# Altium PCB BLUENRG-345_REV1_PT1_UN.PcbDoc (part 1 of 2)
Units mil, origin at the board's own origin, x right, y up, seen from the top; angles counter-clockwise.
Board outline 1244.08 x 1679.7 mil, 2 copper layers (Top Layer, Bottom Layer), stack 12.598 mil thick; 82 components, 55 nets, 261 pads, 212 vias.
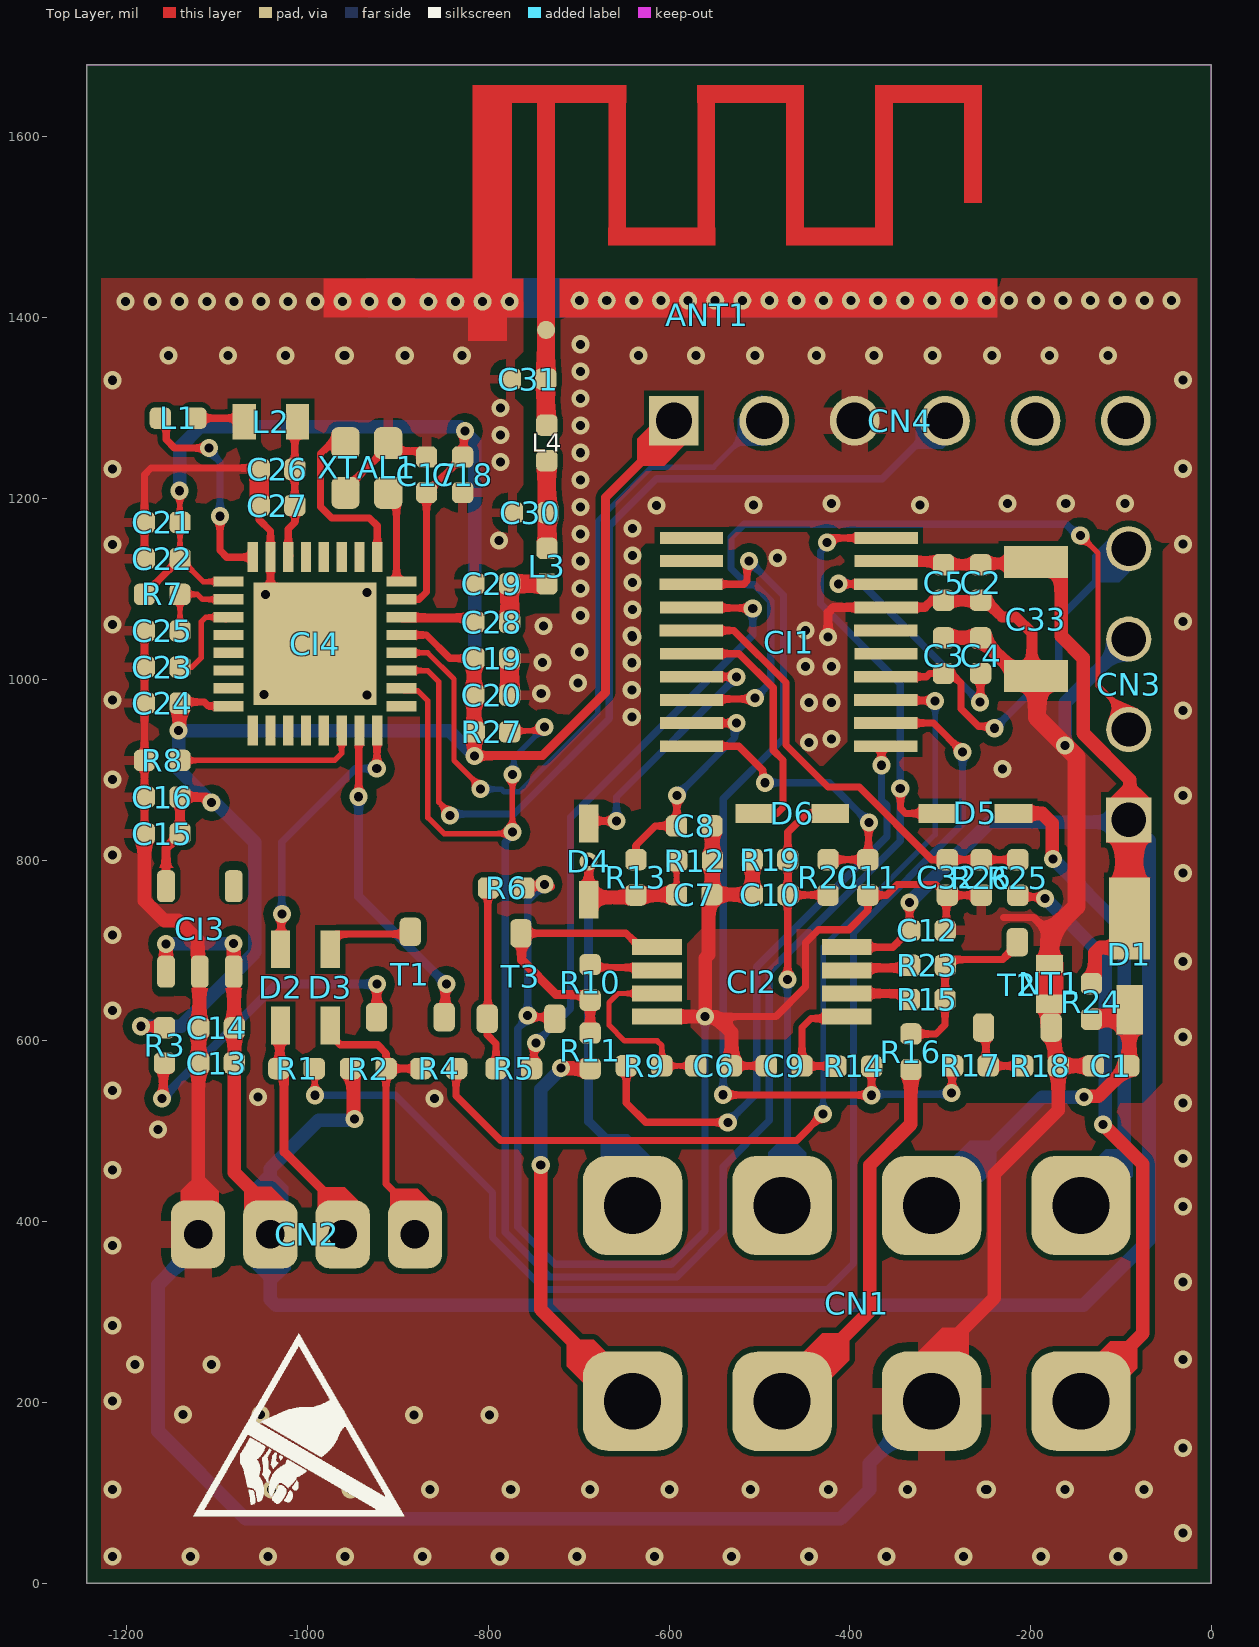
[diagram p0: Top Layer view]
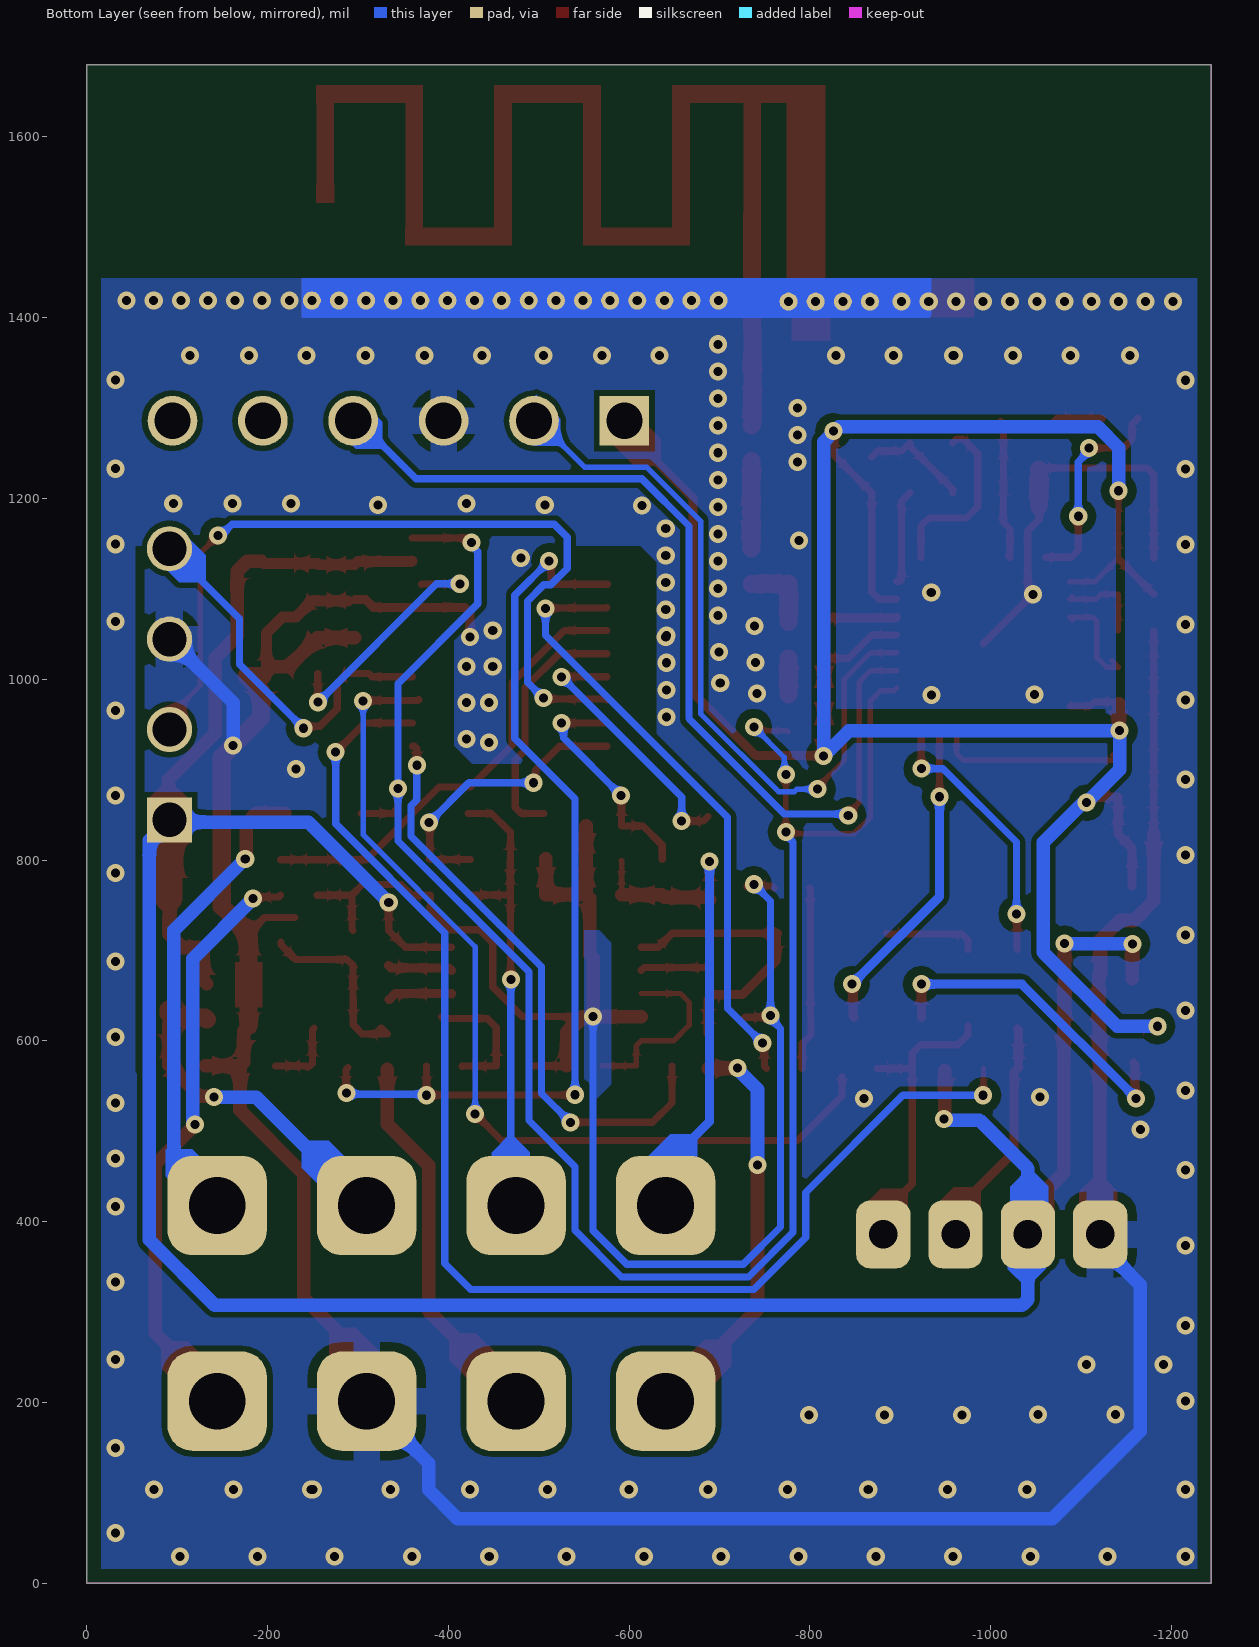
[diagram p1: Bottom Layer view, seen from below]
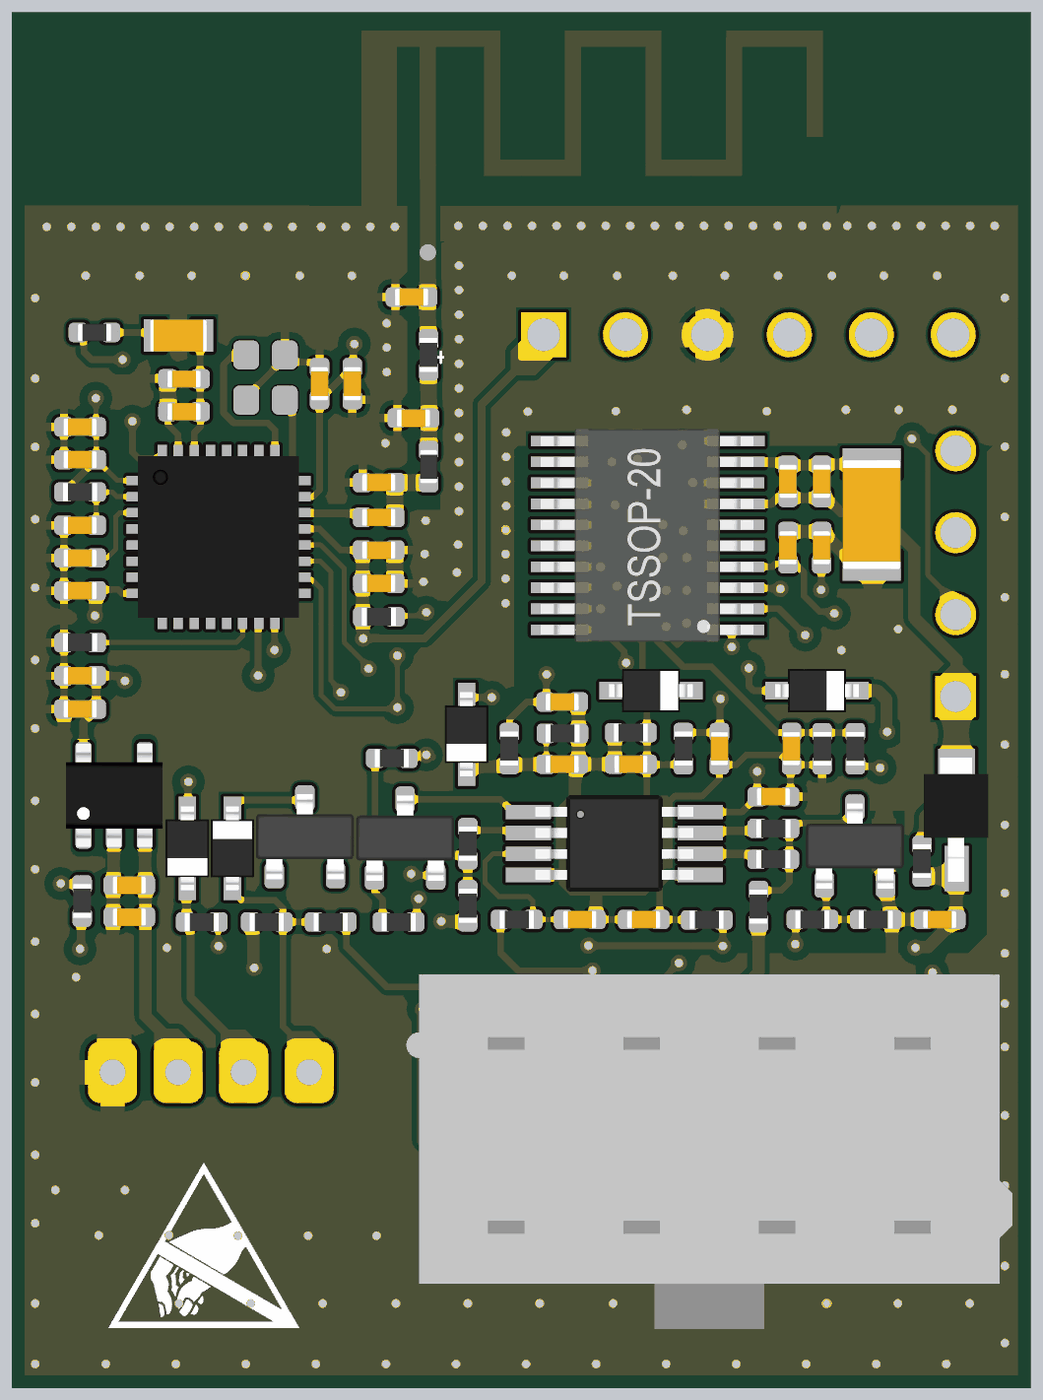
[diagram p2: 3D render of the assembled board from above, using the file's embedded part models]

## Layer stack, top to bottom
Top Solder: solder mask 0.3937, SM-001, Dk 3.5
Top Layer: signal copper 1.378
Dielectric 3: core 9.8425, Core-039, Dk 4.2
Bottom Layer: signal copper 1.378
Bottom Solder: solder mask 0.3937, SM-001, Dk 3.5

## Board outline
-1244.08,0.01 -1244.08,1679.71 0,1679.71 0,0.01

## Design rules (kind name [scope] priority, off if disabled: settings)
AssemblyTestPointUsage [All] p1 off:
AssemblyTestpoint [All] p1 off: testpointundercomponent=TRUE minsize=40 maxsize=100 preferedsize=60 minholesize=0 maxholesize=40 preferedholesize=32 testpointgrid=1 usegrid=TRUE gridtolerance=0.01 allowsidetop=TRUE allowsidebottom=TRUE
Clearance Clearance_Keepout [OnLayer('Keep-Out Layer, Board')] p1: gap=15 ignorepadtopadclearanceinfootprint=FALSE
Clearance Clearance_antena_2 [InNet('NetC32_1')] p2: gap=5 ignorepadtopadclearanceinfootprint=FALSE
Clearance Clearance_antena [InNet('NetC33_1')] p3: gap=5 ignorepadtopadclearanceinfootprint=FALSE
Clearance [All] p4: gap=6 ignorepadtopadclearanceinfootprint=FALSE except(10: Via-Via Via-Fill Via-Poly Via-Region Via-Text Via-Hole)
ComponentClearance [All] p1 off: gap=10 collisioncheckmode=3 verticalgap=10 showdistances=FALSE
DiffPairsRouting [All] p1 off: maxlimit=10 minlimit=10 mostfreqgap=10 toplayer_minwidth=15 toplayer_maxwidth=15 toplayer_prefwidth=15 bottomlayer_minwidth=15 bottomlayer_maxwidth=15 bottomlayer_prefwidth=15 maxuncoupledlength=500
FabricationTestPointUsage [All] p1 off: valid=0 allowmultiple=FALSE
FabricationTestpoint [All] p1 off: side=3 testpointundercomponent=TRUE minsize=40 maxsize=100 preferedsize=60 minholesize=0 maxholesize=40 preferedholesize=32 testpointgrid=1 allowsidetop=TRUE allowsidebottom=TRUE usegrid=TRUE gridtolerance=0.01
FanoutControl Fanout_BGA [IsBGA] p1 off: bgadir=Out bgaviamode=Centered fanoutstyle=Auto fanoutdirection=Alternating viagrid=1 // Fanout_BGA (Default Rule)
FanoutControl Fanout_LCC [IsLCC] p2 off: bgadir=Out bgaviamode=Centered fanoutstyle=Auto fanoutdirection=Alternating viagrid=1 // Fanout_LCC (Default Rule)
FanoutControl Fanout_SOIC [IsSOIC] p3 off: bgadir=Out bgaviamode=Centered fanoutstyle=Auto fanoutdirection=Alternating viagrid=1 // Fanout_SOIC (Default Rule)
FanoutControl Fanout_Small [(CompPinCount < 5)] p4 off: bgadir=Out bgaviamode=Centered fanoutstyle=Auto fanoutdirection=OutThenIn viagrid=1 // Fanout_Small (Default Rule)
FanoutControl Fanout_Default [All] p5 off: bgadir=Out bgaviamode=Centered fanoutstyle=Auto fanoutdirection=Alternating viagrid=1 // Fanout_Default (Default Rule)
Height [All] p1 off: minheight=0 maxheight=1000 prefheight=500
HoleSize [All] p1 off: absolutevalues=TRUE maxlimit=100 minlimit=1 maxpercent=80.000 minpercent=20.000
HoleToHoleClearance [All] p1 off: gap=10 allowstackedmicrovias=TRUE
LayerPairs [All] p1 off: enforce=TRUE
MinimumSolderMaskSliver [All] p1 off: minsoldermaskwidth=8
PasteMaskExpansion [All] p1 off: expansion=0
PlaneConnect [All] p1: planeconnectstyle=Relief reliefexpansion=20 reliefentries=4 reliefconductorwidth=50 reliefairgap=10
PolygonConnect [All] p1: thpad.connectstyle=Relief thpad.reliefconductorwidth=30 thpad.reliefentries=4 thpad.polygonreliefangle="90 Angle" thpad.airgapwidth=10 smdpad.connectstyle=Relief smdpad.reliefconductorwidth=10 smdpad.reliefentries=4 smdpad.polygonreliefangle="90 Angle" smdpad.airgapwidth=10 via.connectstyle=Direct via.reliefconductorwidth=10 via.reliefentries=4 via.polygonreliefangle="90 Angle" via.airgapwidth=10
RoutingCorners [All] p1 off: cornerstyle=45-Degree minsetback=100 maxsetback=100
RoutingLayers [All] p1 off: top layer_v5=TRUE bottom layer_v5=TRUE
RoutingPriority [All] p1 off: routingpriority=0
RoutingTopology [All] p1 off: topology=Shortest
RoutingVias [All] p1: holewidth=10 width=20 viastyle="Through Hole" minholewidth=8 minwidth=16 maxholewidth=10 maxwidth=20
SilkToBoardRegionClearance [All] p1 off:
SilkToSilkClearance [All] p1 off: silktosilkclearance=8
SilkToSolderMaskClearance [IsPad] p1 off: minsilkscreentomaskgap=8 clearancetoexposedcopper=TRUE
SolderMaskExpansion [All] p1 off: expansion=4 istentingtop=FALSE
UnRoutedNet UnRoutedNet_GNDD [InNet('GNDD')] p1: checkbadconnections=TRUE
UnRoutedNet [All] p2 off: checkbadconnections=TRUE
UnpouredPolygon [All] p1 off:
Width [All] p1: maxlimit=30 minlimit=3.94 preferedwidth=5.98 minimp=50.000000 maximp=50.000000 favimp=50.000000
3 further rules are at their usual default settings.

## Classes and differential pairs
component class FAST5.0_BLUENRG-345_REV1_Sheet3: ANT1 C13 C14 C15 C16 C17 C18 C19 C20 C21 C22 C23 C24 C25 C26 C27 C28 C29 C30 C31 CI3 CI4 L1 L2 L3 L4 R7 R8 XTAL1
component class FAST5.0_BLUENRG-345_REV1_Sheet2: C6 C7 C8 C9 C10 C11 C12 CI2 D4 D6 R5 R6 R9 R10 R11 R12 R13 R14 R15 R16 R17 R18 R19 R20 R23 T2 T3
component class FAST5.0_BLUENRG-345_REV1_Sheet1: C1 C2 C3 C4 C5 C32 C33 CI1 CN1 CN2 CN3 CN4 D1 D2 D3 D5 NT1 R1 R2 R3 R4 R24 R25 R26 R27 T1

## Components (designator, comment, footprint, x,y, rotation, side; value= is the part's Value field where it differs from the comment)
ANT1 "Antenna_Bluetury" Antenna_PCB_Bluetury -736,1386.44 r0 top net-tie
C1 "C0402" C0402_REV1 -111.08,572.27 r180 top value=100nF
C2 "C0402" C0402_REV1 -255.2,1107.01 r270 top value=220nF
C3 "C0402" C0402_REV1 -296.34,1026.09 r90 top value=100nF
C4 "C0402" C0402_REV1 -255.2,1026.09 r90 top value=1uF
C5 "C0402" C0402_REV1 -296.34,1107.01 r270 top value=100nF
C6 "C0402" C0402_REV1 -550.58,572.27 r180 top value=220nF
C7 "C0402" C0402_REV1 -572.08,761.77 r0 top value=2n2F
C8 "C0402" C0402_REV1 -572.08,837.77 r0 top value=1nF
C9 "C0402" C0402_REV1 -472.58,572.27 r0 top value=220nF
C10 "C0402" C0402_REV1 -488.08,761.77 r180 top value=2n2F
C11 "C0402" C0402_REV1 -380.08,780.77 r270 top value=1nF
C12 "C0402" C0402_REV1 -314.13,722.16 r180 top value=100nF
C13 "C0402" C0402_REV1 -1100.58,575.27 r0 top value=1nF
C14 "C0402" C0402_REV1 -1100.58,614.27 r0 top value=1uF
C15 "C0402" C0402_REV1 -1160.68,829.09 r0 top value=10uF
C16 "C0402" C0402_REV1 -1160.68,869.66 r0 top value=100nF
C17 "C0402" C0402_REV1 -868.28,1226.21 r270 top value=3pF
C18 "C0402" C0402_REV1 -828.28,1226.21 r90 top value=100nF
C19 "C0402" C0402_REV1 -796.08,1023.15 r180 top value=3pF
C20 "C0402" C0402_REV1 -796.08,982.47 r180 top value=100nF
C21 "C0402" C0402_REV1 -1160.68,1173.5 r0 top value=100nF
C22 "C0402" C0402_REV1 -1160.68,1133.5 r0 top value=4,7uF
C23 "C0402" C0402_REV1 -1160.68,1013.5 r0 top value=220nF
C24 "C0402" C0402_REV1 -1160.68,973.5 r0 top value=100nF
C25 "C0402" C0402_REV1 -1160.68,1053.5 r0 top value=10nF
C26 "C0402" C0402_REV1 -1033.72,1232.15 r0 top value=4,7uF
C27 "C0402" C0402_REV1 -1033.72,1192.15 r0 top value=100nF
C28 "C0402" C0402_REV1 -796.08,1063.15 r0 top value=3,4pF
C29 "C0402" C0402_REV1 -796.08,1105.63 r0 top value=1,2pF
C30 "C0402" C0402_REV1 -753.66,1184.33 r0 top value=0,5pF
C31 "C0603" C0402_REV1 -756,1332 r180 top
C32 "C0402" C0402_REV1 -292.08,780.77 r90 top value=10nF
C33 "C1206" C1206_rev1 -194.11,1066.49 r90 top value=100uF
CI1 "CI_STM8S003F3_TSSOP20" TSSOP20 -467.72,1041.09 r90 top value=STM8S003F3
CI2 "CI_LMV358_TSSOP8" "TSSOP-8_REV1 - MINISO8" -508.42,665.14 r270 top value=LMV358
CI3 "BU30TD3WG" SOT23-5L -1119.08,723.77 r0 top locked
CI4 "BLUENRG-345AC" QFN33 -991.71,1039.16 r0 top
CN1 "CON_MINIFIT_2X4_180" CONECTOR_MINIFIT_2X4_180 -640.33,200.53 r180 top locked
CN2 "CON_JS_1X4_180" "CONECTOR_ 1x4 2.0mm - 180°" -1121.08,385.77 r0 top locked
CN3 "CON_BP1X4_180" CONECTOR_BP1X4_SWIM_180 -91.48,994.37 r90 top locked
CN4 "CON_BP1X6_180" CONECTOR_BP1X6_180 -594.68,1285.97 r0 top locked value=SWD
D1 "D_STPS1L40M_DO216AA" DO216AA_REV1 -90.68,695.37 r270 top value=STPS1L40M
D2 "D_BAS16_SOD323" SOD323_IPC -1029.72,659.03 r90 top value=BAS16
D3 "D_BAS16_SOD323" SOD323_IPC -974.72,659.03 r270 top value=BAS16
D4 "D_BAS16_SOD323" SOD323_IPC -688.88,798.33 r90 top value=BAS16
D5 "D_BAS16_SOD323" SOD323_IPC -261.05,851.6 r180 top value=BAS16
D6 "D_BAS16_SOD323" SOD323_IPC -463.7,851.6 r180 top value=BAS16
L1 "IND 0402 22nH" L0402_REV1 -1143.13,1288.77 r0 top value=22nH
L2 "IND 0603 10uH" C0603_REV1 -1040.52,1285 r0 top value=10uH
L3 "IND 0402 3n9H" L0402_REV1 -735.08,1125.1 r90 top value=3n9H
L4 "RES 0402 0R 1/16W 5%" R0402_REV1 -735.15,1261.32 r270 top value=0R
NT1 "NET TIE 30mils" "NET TIE 30mils" -179.03,663.01 r90 top net-tie value={Value}
R1 "RES 0402 4K7 1/16W 5%" R0402_REV1 -1012.08,569.27 r0 top value=4K7
R2 "R0603" R0402_REV1 -932.72,569.27 r180 top value=47K
R3 "R0603" R0402_REV1 -1158.15,594.88 r90 top value=100R
R4 "RES 0402 4K7 1/16W 5%" R0402_REV1 -854.72,569.27 r0 top value=4K7
R5 "RES 0402 4K7 1/16W 5%" R0402_REV1 -771.7,569.27 r180 top value=4K7
R6 "R0603" R0402_REV1 -780.08,769.08 r180 top value=33K
R7 "R0402" R0402_REV1 -1160.68,1094 r0 top value=10K
R8 "R0402" R0402_REV1 -1160.68,910.23 r180 top value=100K
R9 "R0603" R0402_REV1 -627.58,572.27 r0 top value=33K
R10 "R0402" R0402_REV1 -687.25,664.69 r270 top value=100K
R11 "RES 0402 4R7 1/16W 5%" R0402_REV1 -687.25,588.96 r270 top value=4R7
R12 "R0402" R0402_REV1 -571.67,799.35 r180 top value=100K
R13 "R0603" R0402_REV1 -636.58,780.77 r90 top value=33K
R14 "R0603" R0402_REV1 -395.58,571.77 r180 top value=33K
R15 "R0402" R0402_REV1 -314.37,645.67 r0 top value=100K
R16 "RES 0402 4R7 1/16W 5%" R0402_REV1 -332.38,587.97 r270 top value=4R7
R17 "RES 0402 4K7 1/16W 5%" R0402_REV1 -266.58,572.27 r0 top value=4K7
R18 "R0603" R0402_REV1 -189.08,572.27 r180 top value=33K
R19 "R0402" R0402_REV1 -488.28,800.37 r0 top value=100K
R20 "R0603" R0402_REV1 -424.08,780.77 r90 top value=33K
R23 "RES 0402 0R 1/16W 5%" R0402_REV1 -314.08,683.47 r0 top value=0R
R24 "RES 0402 0R 1/16W 5%" R0402_REV1 -132.68,643.49 r270 top value=0R
R25 "R0402" R0402_REV1 -214.13,780.65 r270 top value=100K
R26 "R0402" R0402_REV1 -254.58,780.65 r270 top value=100K
R27 "R0402" R0402_REV1 -795.96,941.7 r0 top value=100K
T1 "NX7002AK" SOT23_REV1 -886.23,673.27 r90 top
T2 "BC817" SOT23_REV1 -214.68,661.9 r90 top locked
T3 "BC817" SOT23_REV1 -763.83,671.66 r90 top
XTAL1 "XTAL_CX2016DB" CX2016DB -934.33,1233.76 r270 top value=32MHz

## Footprints (in the part's own frame and the unit in brackets; to place one, negate y for a bottom-side part, rotate by r counter-clockwise, add the part's x,y. Pads: shape width x height; smd on the part's side, far side on the other; paste and mask are expansions set on the pad)
Antenna_PCB_Bluetury [mil]
  round 20 smd mask+4: 1(0,0)
  round 20 hole 10 mask+4: 2(-130.31,31.33) 2(-100.31,31.33) 2(-70.31,31.33) 2(-40.31,31.33) 2(37.09,32.51) 2(67.09,32.51) 2(97.09,32.51) 2(127.09,32.51) 2(157.09,32.51) 2(187.09,32.51) 2(217.09,32.51) 2(247.09,32.51) 2(277.09,32.51) 2(307.09,32.51) 2(337.09,32.51) 2(367.09,32.51) 2(397.09,32.51) 2(427.1,32.51) 2(457.1,32.51) 2(487.1,32.51)
  Top Layer region: -81.18,270.79 -81.18,46.29 -37.87,46.29 -37.87,270.79
  Top Layer region: 68.85,251.16 68.85,270.76 88.45,270.76 88.45,251.16
  Top Layer region: 68.85,93.68 68.85,113.28 88.45,113.28 88.45,93.68
  Top Layer region: 167.27,93.68 167.27,113.28 186.87,113.28 186.87,93.68
  Top Layer region: 167.27,251.16 167.27,270.76 186.87,270.76 186.87,251.16
  Top Layer region: 265.7,251.16 265.7,270.77 285.3,270.76 285.3,251.16
  Top Layer region: 265.7,93.68 265.7,113.28 285.3,113.28 285.3,93.68
  Top Layer region: 364.12,93.68 364.12,113.28 383.72,113.28 383.72,93.68
  Top Layer region: 364.12,251.16 364.12,270.76 383.72,270.76 383.72,251.16
  Top Layer region: 462.55,251.16 462.55,270.76 482.15,270.76 482.15,251.16
  Top Layer region: 462.55,140.93 462.55,160.53 482.15,160.53 482.15,140.93
  Top Layer lines w19.68: -67.95,261.12 -0.57,260.94 ; -27.57,261.09 -27.18,261.09 ; 0,0 -0.18,260.91 78.62,260.91 78.62,103.43 177.05,103.43 177.05,260.91 275.48,260.91 275.48,103.43 373.9,103.43 373.9,260.91 472.33,260.91 472.33,150.68
C0402_REV1 [mm]
  rrect50% 0.6x0.6 smd: 1(-0.5,0) 2(0.5,0)
  body extent -0.53,-0.28 0.53,0.28, height 0.6
C0603_REV1 [mm] "Capacitor SMD"
  rect 0.65x1 smd: 1(-0.75,0) 2(0.751,0)
  body extent -0.88,-0.5 0.89,0.51, height 0.91
C1206_rev1 [mm] "Capacitor SMD 1206"
  rect 0.9x1.8 smd: 1(-1.6,0) 2(1.6,0)
  body extent -1.7,-0.9 1.7,0.9, height 1.8
"CONECTOR_ 1x4 2.0mm - 180°" [mil] "Conector 1x4 180º 2.00mm"
  rrect50% 60x75 hole 31.5: 1(0,0) 2(80,0) 3(160,0) 4(240,0)
  body extent -80,-70 320,117, height 236
CONECTOR_BP1X4_SWIM_180 [mil] "Conector barra de pinos 1x4 180º SWIN"
  rect 50x50 hole 38: 1(-150,0)
  round 50 hole 38: 2(-50,0) 3(50,0) 4(150,0)
CONECTOR_BP1X6_180 [mil] "Conector barra de pinos 1x6 180º"
  rect 55x55 hole 40: 1(0,0)
  round 55 hole 40: 2(100,0) 3(200,0) 4(300,0) 5(400,0) 6(500,0)
CONECTOR_MINIFIT_2X4_180 [mil] "Conector MINIFIT 2x4 180º"
  rrect50% 110x110 hole 63: 1(-0.03,-0.72) 2(-0.03,-217.24) 3(-165.39,-0.71) 4(-165.39,-217.24) 5(-330.75,-0.72) 6(-330.75,-217.24) 7(-496.1,-0.72) 8(-496.1,-217.24)
  body extent -618,-305 122,128, height 120
CX2016DB [mm] "Cristal"
  rrect50% 0.9x0.8 smd mask+0.05: 1(-0.7,-0.6) 2(0.7,-0.6) 3(0.7,0.6) 4(-0.7,0.6)
  body extent -1,-0.79 1,0.81, height 0.4
DO216AA_REV1 [mm] "Diodo DO216AA REV1"
  rect 0.254x0.508 smd paste+0 mask+0: 1(-1.54,-0.008)
  rect 2.3x1.15 smd: 1(-1.016,0.008)
  rect 1.4x0.75 smd: 2(1.55,0.008)
  body extent -1.89,-1.01 1.96,0.99, height 1.01
L0402_REV1 [mm]
  rrect50% 0.6x0.6 smd: 1(-0.5,0) 2(0.5,0)
  body extent -0.53,-0.28 0.53,0.28, height 0.6
"NET TIE 30mils" [mil] "Net Tie 30mils"
  rect 20x30 smd paste-11.81 mask+0: 1(22,0) 2(-22,0)
  Top Layer region: 24,-15 -26,-15 -26,15 24,15
QFN33 [mm] "QFN 32 + GND"
  rect 0.29x0.84 smd: 1(-1.75,-2.435) 2(-1.25,-2.435) 3(-0.75,-2.435) 4(-0.25,-2.435) 5(0.25,-2.435) 6(0.75,-2.435) 7(1.25,-2.435) 8(1.75,-2.435) 17(1.75,2.435) 18(1.25,2.435) 19(0.75,2.435) 20(0.25,2.435) 21(-0.25,2.435) 22(-0.75,2.435) 23(-1.25,2.435) 24(-1.75,2.435)
  rect 0.84x0.29 smd: 9(2.435,-1.75) 10(2.435,-1.25) 11(2.435,-0.75) 12(2.435,-0.25) 13(2.435,0.25) 14(2.435,0.75) 15(2.435,1.25) 16(2.435,1.75) 25(-2.435,1.75) 26(-2.435,1.25) 27(-2.435,0.75) 28(-2.435,0.25) 29(-2.435,-0.25) 30(-2.435,-0.75) 31(-2.435,-1.25) 32(-2.435,-1.75)
  rect 3.45x3.45 smd: 33(0,0)
  body extent -2.5,-2.5 2.5,2.5, height 1.05
R0402_REV1 [mm]
  rrect50% 0.6x0.6 smd: 1(-0.5,0) 2(0.5,0)
  body extent -0.53,-0.28 0.53,0.28, height 0.6
SOD323_IPC [mm] "Encapsulamento SOD323"
  rect 1.06x0.54 smd: 1(1.07,0) 2(-1.07,0)
  body extent -1.3,-0.67 1.3,0.68, height 1.1
SOT23-5L [mm] "Encapsulamento SOT23 5v"
  rrect50% 0.5x0.9 smd: 1(-0.95,-1.2) 2(0,-1.2) 3(0.95,-1.2) 4(0.95,1.2) 5(-0.95,1.2)
  body extent -1.5,-1.6 1.5,1.6, height 0.92
SOT23_REV1 [mm] "Encapsulamento SOT23 REV1"
  rrect50% 0.8x0.6 smd: 1(-1.2,0.95) 2(-1.2,-0.95) 3(1.2,0)
  body extent -1.32,-1.52 1.32,1.52, height 1.11
TSSOP20 [mil] "Encapsulamento TSSOP20"
  rect 13x70 smd: 1(-115.16,-107.45) 2(-89.56,-107.42) 3(-63.98,-107.45) 4(-38.39,-107.49) 5(-12.8,-107.73) 6(12.8,-107.52) 7(38.39,-107.87) 8(64.1,-107.48) 9(89.69,-107.87) 10(115.16,-107.87) 11(115.16,107.48) 12(89.68,107.48) 13(64.09,107.87) 14(38.39,107.48) 15(12.8,107.56) 16(-12.8,107.53) 17(-38.39,107.47) 18(-63.98,107.45) 19(-89.57,107.45) 20(-115.14,107.53)
  body extent -130,-129 130,130, height 47
"TSSOP-8_REV1 - MINISO8" [mm] "Encapsulamento TSSOP8 REV1"
  rect 0.45x1.4 smd: 1(-0.975,-2.667) 2(-0.325,-2.667) 3(0.325,-2.667) 4(0.975,-2.667) 5(0.975,2.667) 6(0.325,2.667) 7(-0.325,2.667) 8(-0.975,2.667)
  body extent -1.5,-2.45 1.5,2.45, height 1.15

## Part data
ANT1: library part ANT_Bluetury, "PCB ANTENNA", Código Tury=AMOSTRA, Tipo de Montagem=SMD
C1 C3 C5 C12 C16 C18 C20 C21 C24 C27: library part "CAP_0402 100nF 10% 50V X7R", "CAPACITOR 0402 100NF / 50V X7R 10%", Partnumber Fabricante 01=GCM155R71H104KE02D, Partnumber Fabricante 02=CC0402KRX5R9BB104, Código Tury=002.00.00015, Fabricante 01=MURATA, Fabricante 02=YAGEO, Tipo de Montagem=SMD
C2 C6 C9 C23: library part "CAP_0402 220nF 10% 16V X7R", "CAPACITOR 0402 220NF / 16V X7R 10%", Partnumber Fabricante 01=GRM155R71H224KA12D, Partnumber Fabricante 02=CC0402KRX7R8BB224, Partnumber Fabricante 03=UMK105BJ224KV-F, Código Tury=002.00.00014, Fabricante 01=MURATA, Fabricante 02=YAGEO, Fabricante 03=TAIYO-YUDEN, Tipo de Montagem=SMD
C4 C14: library part "CAP_0402 1uF 10% 16V X6S", "CAPACITOR 0402 1UF / 16V X6S 10%", Partnumber Fabricante 01=EMK105C6105KV-F, Partnumber Fabricante 02=CC0402KRX6S7BB105, Partnumber Fabricante 03=C1005X6S1C105K050BC, Código Tury=002.00.00009, Fabricante 01=TAIYO-YUDEN, Fabricante 02=YAGEO, Fabricante 03=TDK, Tipo de Montagem=SMD
C7 C10: library part "CAP_0402 2n2F 5% 50V X7R", "CAPACITOR 0402 2n2F / 50V C0G 5%", Código Tury=002.00.00017, Tipo de Montagem=SMD
C8 C11 C13: library part "CAP_0402 1nF 5% 50V X7R", "CAPACITOR 0402 1NF / 50V C0G 5%", Partnumber Fabricante 01=GRT1555C1H102JA02D, Partnumber Fabricante 02=CL05B102KB5NNNC, Partnumber Fabricante 03=CC0402JRNP09BN102, Código Tury=002.00.00004, Fabricante 01=MURATA, Fabricante 02=SAMSUNGEM, Fabricante 03=YAGEO, Tipo de Montagem=SMD
C15: library part "CAP_0402 10uF 20% 6V3 X6S", "CAPACITOR 0402 10UF / 6.3V X6S 20%", Partnumber Fabricante 01=GRM155C80J106ME11D, Código Tury=002.00.00010, Encapsulamento=0402, Fabricante 01=MURATA, Tipo de Montagem=SMD
C17 C19: library part "CAP_0402 3pF 10% 25V C0G", "CAPACITOR 0402 3pF / 25V C0G", Partnumber Fabricante 01=VJ0402D3R0BXCAJ, Código Tury=002.00.00024, Fabricante 01=VISHAY, Fabricante 02=KEMET, Tipo de Montagem=SMD
C22 C26: library part "CAP_0402 4,7uF 10% 50V X7R1", "CAPACITOR 0402 4,7uF / 50V X7R 10%", Código Tury=002.00.00022, Tipo de Montagem=SMD
C25: library part "CAP_0402 10nF 5% 25V X7R", "CAPACITOR 0402 10NF / 25V X7R 5%", Partnumber Fabricante 01=GRM155R71E103JA01J, Partnumber Fabricante 02=CC0402KRX7R8BB103, Partnumber Fabricante 03=CC0402JRX7R8BB103, Código Tury=002.00.00007, Fabricante 01=MURATA, Fabricante 02=YAGEO, Fabricante 03=YAGEO, Tipo de Montagem=SMD
C28: library part "CAP_0402 3,4pF 10% 25V C0G_", "CAPACITOR 0402 3,4pF / 25V C0G", Partnumber Fabricante 01=GRM1555C1E3R4BA01D, Código Tury=002.00.00026, Fabricante 01=MURATA, Tipo de Montagem=SMD
C29: library part "CAP_0402 1,2pF 10% 25V C0G", "CAPACITOR 0402 1,2pF / 25V C0G", Partnumber Fabricante 01=VJ0402A1R2BXXCW1BC, Partnumber Fabricante 02=04023J1R2ABSTR, Código Tury=002.00.00025, Fabricante 01=Vishay, Fabricante 02="KYOCERA AVX", Tipo de Montagem=SMD
C30: library part "CAP_0402 0,5pF 5% 50V C0G", "CAPACITOR 0402 0,5PF / 50V C0G 5%", Partnumber Fabricante 01=CC0402BRNPO9BNR50, Partnumber Fabricante 02=C0402C508C5GACTU, Código Tury=002.00.00023, Fabricante 01=Yageo, Fabricante 02=KEMET, Tipo de Montagem=SMD
C31: "Capacitor"
C32: library part "CAP 0603 47nF 50V X7R 10%", "CAPACITOR 0402 10NF / 25V X7R 5%", Partnumber Fabricante 01=GRM155R71E103JA01J, Partnumber Fabricante 02=CC0402KRX7R8BB103, Partnumber Fabricante 03=CC0402JRX7R8BB103, Código Tury=002.00.00007, Fabricante 01=MURATA, Fabricante 02=YAGEO, Fabricante 03=YAGEO, Tipo de Montagem=SMD
C33: library part "CAP_1206 100uF 6V3 X5R 20%", "CAPACITOR 1206 100UF / 6V3 X5R 20%", Partnumber Fabricante 01=GMC31X5R107M6R3NT, Código Tury=002.03.00006, Encapsulamento=1206, Fabricante 01="CAL-CHIP ELECTRONICS, INC.", Tipo de Montagem=SMD
CI1: "CI MICROCONTROLADOR STM8S003F3P6", Partnumber Fabricante 01=STM8S003F3P6TR, Código Tury=004.07.00026, Fabricante 01=ST, Tipo de Montagem=SMD
CI2: "CI AMPLIFICADOR OPERACIONAL LMV358IPT TSSOP8", Partnumber Fabricante 01=LMV358IPT, Código Tury=004.00.00011, Encapsulamento=TSSOP8, Fabricante 01=ST, Tipo de Montagem=SMD
CI3: library part CI_BU30TD3WG_SSOP5, "CI ANALÓGICO REG DE TENSÃO  BU30TD3WG SSOP5", Código Tury=004.02.00014, Encapsulamento=SSOP5, Fabricante 01=ROHM, Partnumber Fabricante 01=BU30TD3WG, Tipo de Montagem=SMD
CI4: library part CI_BLUENRG-345, "CI MICROCOTROLADOR BLUENRG-345AC", Código Tury=004.07.00052
CN1: library part CONECTOR_MINIFIT_2X4_180_PT, "CONECTOR PCI - POTENCIA MINIFIT PT 180° 2X4X4,2MM", Código Tury=014.11.00221, Tipo de Montagem=PTH
CN2: library part CONECTOR_JS_1X4_180, "CONECTOR PCI - SINAL 180° - 1X4X2,0MM", Partnumber Fabricante 01=LW-2002P0400T, Código Tury=014.10.00819, Fabricante 01=LANDWIN, Tipo de Montagem=PTH
CN3: library part CON_BPT_1X4_180, "BARRA DE PINO - SECAO QUADRADA 180º 1X4X2,54MM", Part Number=013.07.00104, Tipo de Montagem=PTH
CN4: library part CONECTOR_BP1X6_180, "Conector barra de pinos 1x6 180º", Part Number=013.07.00108
D1: "DIODO SCHOTTKY STPS1L40M DO2126-AA", Código Tury=005.04.00002, Tipo de Montagem=SMD
D2 D3 D4 D5 D6: "DIODO DE SINAL BAS16 SOD323", Partnumber Fabricante 01=BAS316, Partnumber Fabricante 02=BAS16HT1G, Partnumber Fabricante 03=BAS16WS, Código Tury=005.00.00010, Fabricante 01=NXP, Fabricante 02=ON, Fabricante 03=VISHAY, Tipo de Montagem=SMD
L1: "MICRO INDUTOR SMD 0402 22nH", Partnumber Fabricante 01=LQG15WH22NH02D, Código Tury=003.02.00015, Encapsulamento=0402, Fabricante 01=MURATA, Tipo de Montagem=SMD
L2: "MICRO INDUTOR  SMD 0603 10uH", Partnumber Fabricante 01=MLZ1608N100LT000, Código Tury=003.02.00010, Encapsulamento=0603, Fabricante 01=TDK, Tipo de Montagem=SMD
L3: "MICRO INDUTOR SMD 0402 3,9nH", Partnumber Fabricante 01=LQG15HS3N9S02D, Código Tury=003.02.00007, Encapsulamento=0402, Fabricante 01=MURATA, Tipo de Montagem=SMD
L4 R23 R24: "RESISTOR 0402 0R 1/16W 5%", Partnumber Fabricante 01=RC0402JR-070RL, Partnumber Fabricante 02=MR04X000PTL, Código Tury=001.00.00024, Encapsulamento=0402, Fabricante 01=YAGEO, Fabricante 02=WALSIN, Tipo de Montagem=SMD
R1 R4 R5 R17: "RESISTOR 0402 4K7 1/16W 5%", Partnumber Fabricante 01=CRCW04024K70JNED, Partnumber Fabricante 02=CR-02JL6---4K7, Partnumber Fabricante 03=WR04X472JTL, Código Tury=001.00.00009, Encapsulamento=0402, Fabricante 01=VISHAY, Fabricante 02=VIKING, Fabricante 03=WALSIN, Tipo de Montagem=SMD
R2: library part "RES 0402 47K 1/16W 5%", "RESISTOR 0402 47K 1/16W 5%", Partnumber Fabricante 01=CRCW040247K0JNEDHP, Partnumber Fabricante 02=CR-02JL6--47K, Partnumber Fabricante 03=RI0402L473JT, Código Tury=001.00.00006, Encapsulamento=0402, Fabricante 01=VISHAY, Fabricante 02=VIKING, Fabricante 03=HOTTECH, Tipo de Montagem=SMD
R3: library part "RES 0402 100R 1/16W 5%", "RESISTOR 0402 100R 1/16W 5%", Partnumber Fabricante 01=CR0402AJW-101GAS, Partnumber Fabricante 02=CR-02JL6--100R, Partnumber Fabricante 03=WR04X101JTL, Código Tury=001.00.00001, Encapsulamento=0402, Fabricante 01=BOURNS, Fabricante 02=VIKING, Fabricante 03=WALSIN, Tipo de Montagem=SMD
R6 R9 R13 R14 R18 R20: library part "RES 0402 33K 1/16W 5%", "RESISTOR 0402 33K 1/16W 5%", Partnumber Fabricante 01=CRCW040233K0JNEDC, Código Tury=001.00.00023, Encapsulamento=0402, Fabricante 01=VISHAY, Tipo de Montagem=SMD
R7: library part "RES 0402 10K 1/16W 5%", "RESISTOR 0402 10K 1/16W 5%", Partnumber Fabricante 01=CRCW040210K0JNED, Partnumber Fabricante 02=CR-02JL6---10K, Partnumber Fabricante 03=WR04X103JTL, Código Tury=001.00.00007, Encapsulamento=0402, Fabricante 01=VISHAY, Fabricante 02=VIKING, Fabricante 03=WALSIN, Tipo de Montagem=SMD
R8 R10 R12 R15 R19 R25 R26 R27: library part "RES 0402 100K 1/16W 5%", "RESISTOR 0402 100K 1/16W 5%", Partnumber Fabricante 01=CRCW0402100KJNED, Partnumber Fabricante 02=CR-02JL6--100K, Partnumber Fabricante 03=WR04X104JTL, Código Tury=001.00.00005, Encapsulamento=0402, Fabricante 01=VISHAY, Fabricante 02=VIKING, Fabricante 03=WALSIN, Tipo de Montagem=SMD
R11 R16: "RESISTOR 0402 4R7 1/16W 5%", Partnumber Fabricante 01=CRCW04024R70JNED, Partnumber Fabricante 02=CR-02JL6--4R7, Partnumber Fabricante 03=RC-02U4R7JT, Código Tury=001.00.00011, Encapsulamento=0402, Fabricante 01=VISHAY, Fabricante 02=VIKING, Fabricante 03=FENGHUA, Tipo de Montagem=SMD
T1: library part T_NX7002AK, "TRANSISTOR MOSFET CANAL N 60V ,19A NX7002AK", Código Tury=006.06.00013, Tipo de Montagem=SMD
T2 T3: library part T_BC817_SOT23, "TRANSISTOR BIPOLAR DE SINAL BC817/40  SOT23", Partnumber Fabricante 01=BC817-40LT1G, Partnumber Fabricante 02=BC817-40,215, Código Tury=006.00.00004, Encapsulamento=SOT23, Fabricante 01=ON, Fabricante 02=NXP, Tipo de Montagem=SMD
XTAL1: "CRISTAL OSCILADOR 32MHZ SMD", Partnumber Fabricante 01=CX2016DB32000H0WRRC1, Partnumber Fabricante 02=CX2016DB32000H0FLJC1, Código Tury=009.01.00012, Encapsulamento=CX2016DB, Fabricante 01=AVX, Fabricante 02=KYOCERA, Tipo de Montagem=SMD

## Via types
v1: diameter 20, hole 10, Top Layer to Bottom Layer, tented both sides, 212 vias

## Nets (pads, with @x,y where several pads share a name; then routed paths per layer and width w, separated by ;. In a path a pad name is that pad's centre, name@x,y a point inside that pad or via, vN(x,y) a via of type N, cw(c..) or ccw(c..) an arc to the next point about the centre after c; other vN are vias at no path point)
+3V: C15.2 C16.2 C17.2 C18.2 C19.2 C20.2 C21.2 C22.2 C24.2 CI3.5 CI4.13 CI4.15 CI4.25 CI4.32 CN4.1 R3.2 R7.1 R27.1 | length 2907.4
  Top Layer w5.98: v1(-1141.54,1208.55) -1141.27,1208.27 -1141.27,1173.77 -1141.54,1173.5 -1140.99,1172.95 C22.2 -1115.55,1108.06 CI4.25
  Top Layer w8: R7.1 -1180.36,1094.06 C22.2 C22.2 ; C24.2@-1141.88,972.61 C24.2 -1139.54,974.94 -1114.3,974.94 -1109.62,970.26 CI4.32 CI4.32@-1089.2,971.88 ; CI4.13 -868.44,1049 -842.55,1023.12 C19.2@-818.72,1023.12 ; CI4.15 -876.5,1088.37 -868.28,1096.59 C17.2@-868.28,1206.21 ; C17.2 C17.2@-868.28,1206.21 ; v1(-825.83,1274.59) -827.05,1273.37 -827.05,1247.12 C18.2 -828.59,1245.9 C17.2@-868.28,1206.21
  Top Layer w10: v1@-1184.82,614.57 -1184.05,615.34 -1158.92,615.34 R3.2 ; CI3.5 -1156.49,813.11 -1140.99,828.6 C15.2 C16.2 -1112.2,869.66 v1(-1105.98,863.44) ; v1@-815.36,915.42 -740.05,915.42 -670.33,985.14 -670.33,1201.04 -594.68,1276.69 CN4.1
  Top Layer w15: v1(-1142.55,943.14) -1141.77,943.92 -1141.77,972.5 C24.2@-1141.88,972.61 ; C19.2@-818.72,1023.12 -815.8,1023.12 C19.2 -815.76,983.15 C20.2@-815.7,983.1 ; C20.2@-815.42,982.82 C20.2@-815.7,983.1 ; v1(-815.09,915.14) -815.36,915.42 -815.37,941.42 R27.1 -815.7,941.76 C20.2@-815.7,983.1
  Bottom Layer w15: v1(-1184.26,616.11) -1139.85,616.11 -1058.18,697.78 -1058.18,819.47 -1102.15,863.44 v1(-1105.98,863.44) -1142.55,900.02 v1(-1142.55,943.14) -843.09,943.14 v1(-815.09,915.14) -815.09,1262.5 -825.83,1273.24 v1(-825.83,1274.59) -827.18,1274.59 -831.79,1279.2 -1118.58,1279.2 -1141.54,1256.24 v1(-1141.54,1208.55)
+5V: C2.1 C5.1 C12.2 C13.2 C14.2 C33.2 CI1.9 CI2.8 CI3.1 CI3.3 CN2.2 CN3.1 D1.1 R2.2 R24.1 | length 3352.5
  Top Layer w8: CI2.8@-403.42,703.25 -403.14,703.53 -352.45,703.53 C12.2 ; v1(-333.98,752.99) -333.9,752.91 C12.2@-333.9,722.24
  Top Layer w10: CI3.3@-1081.68,668.65 CI3.3@-1080.48,667.45 ; C13.2@-1081.25,575.62 C13.2
  Top Layer w12: CI1.9 -359.35,1130.28 -299.91,1130.28 C5.1 -256.59,1126.7 -255.2,1128.09 -195.5,1128.09 C33.2 C33.2@-192.82,1130.78
  Top Layer w15: v1(-1156.58,707.27) v1(-1156.58,707.27) -1156.54,668.7 CI3.1@-1156.49,668.65 ; v1(-1081.68,707.51) CI3.3 -1081.68,668.65 -1081.68,667.03 -1081.29,666.64 -1081.29,614.66 C14.2 -1080.9,575.97 C13.2@-1081.25,575.62 ; C13.2 -1080.9,454.34 -1056.08,429.52 -1056.08,400.77 CN2.2 ; R2.2@-949.11,567.15 -949.11,514.23 v1(-948.16,513.27) ; C33.2@-192.82,1130.78 -177.69,1130.78 -166.18,1119.27 -166.18,1047.81 -141.98,1023.61 -141.98,940.42 -90.28,888.72 CN3.1@-90.28,840.97 ; R24.1 -128.79,667.06 -128.79,697.48 -123.07,703.2 -105.51,703.2 -90.37,718.34 -90.37,735.37 -91.66,736.66 -91.66,755.99 D1.1@-90.28,757.37
  Top Layer w30: D1.1@-90.28,757.37 -90.93,758.01 -90.93,840.33 CN3.1@-90.28,840.97
  Bottom Layer w15: v1(-1156.58,707.27) -1156.46,707.39 -1081.8,707.39 v1(-1081.68,707.51) ; v1(-948.16,513.27) -949.11,512.32 -987.45,512.32 -1041.08,458.68 CN2.2 -1041.08,313.83 -1034.52,307.27 -141.75,307.27 -69.04,379.97 -69.04,821.93 CN3.1@-89.88,842.77 ; v1(-333.98,752.99) -244.98,841.99 -93.86,841.99 CN3.1
GND: ANT1.2 C1.2 C13.1 C14.1 C15.1 C16.1 C17.1 C18.1 C19.1 C20.1 C21.1 C22.1 C23.1 C24.1 C25.1 C26.1 C27.1 C29.1 C30.1 C31.2 CI3.2 CI4.23 CI4.33 CN1.5 CN2.1 CN4.3 NT1.2 R8.2 R18.1 T2.2 XTAL1.2 XTAL1.4 | length 3051.5
  Top Layer w8: C15.1 C16.1 C24.1 C23.1 C25.1 ; C22.1 C21.1 -1180.36,1226.32 -1173.05,1233.64 -1054.88,1233.64 C26.1 ; C27.1 -1053.4,1176.47 -1040.92,1164 CI4.23 -1040.92,1088.37 CI4.33 ; XTAL1.2 -957.95,1210.14 -910.7,1257.38 XTAL1.4 -901.92,1252.53 -874.91,1252.53 C17.1
  Top Layer w15: C15.1 -1180.36,755.06 -1158.41,733.11 -1142.85,733.11 -1121.43,711.69 -1121.43,673.75 -1119.68,672 -1119.68,614.86 C14.1 C13.1 ; CN2.1 -1120.68,386.18 -1120.68,574.86 C13.1@-1121.08,575.27 ; CN1.5 -309.58,246.09 -240.08,315.59 -240.08,452.35 -169.4,523.03 R18.1 ; T2.2@-179.03,616.41 T2.2 -173.34,610.72 -173.34,576.21 R18.1 ; C1.2 R18.1
  Top Layer w20: C27.1 C26.1 ; C20.1@-776.39,983.15 C19.1 ; T2.2@-179.03,616.41 NT1.2
  Bottom Layer w15: CN2.1 -1121.08,374.21 -1165.37,329.92 -1165.37,168.29 -1068.16,71.07 -410.38,71.07 -378.25,103.2 -378.25,132.59 CN1.5
  other v1: -1215.58,29.68 -1129.36,29.68 -1043.84,29.68 -958.32,29.68 -872.79,29.68 -787.27,29.68 -701.75,29.68 -616.22,29.68 -530.7,29.68 -445.18,29.68 -359.65,29.68 -274.13,29.68 -188.61,29.68 -103.08,29.68 -31.58,55.28 -1215.58,103.57 -1040.02,103.57 -952.23,103.57 -864.45,103.57 -775.12,103.57 -687.33,103.57 -599.55,103.57 -509.83,103.57 -423.84,103.57 -336.06,103.57 -249.95,103.57 -248.27,103.57 -162.17,103.57 -74.38,103.57 -31.58,149.33 -967.97,186.25 -882.27,186.25 -798.75,186.25 -1137.87,186.75 -1052.17,186.75 -1215.58,201.56 -1190.87,241.95 -1105.97,241.95 -31.58,247.49 -1215.58,285.08 -31.58,333.19 -1215.58,373.4 -31.58,416.71 -1215.58,456.92 -31.58,469.59 -1165.58,501.83 -31.58,531.04 -859.59,536.28 -1054.58,537.77 -1215.58,545.24 -31.58,604.44 -1215.58,633.57 -31.58,687.62 -1215.58,717.09 -31.58,785.77 -1215.58,805.41 -31.58,871.48 -1215.58,888.93 -641.23,958.25 -31.58,965.53 -1215.58,977.25 -1048.35,983.26 -934.37,982.34 -741.39,984.33 -641.23,988.25 -700.72,995.87 -641.23,1018.25 -739.88,1018.37 -699.21,1029.91 -640.42,1046.91 -641.23,1048.25 -738.74,1059.04 -1215.58,1060.77 -31.58,1063.69 -698.07,1070.58 -640.42,1076.91 -1046.65,1094 -934.17,1095.9 -698.07,1100.58 -640.42,1106.91 -698.07,1130.58 -640.42,1136.91 -1215.58,1149.09 -31.58,1149.39 -787.9,1153.61 -698.07,1160.58 -640.42,1166.91 -698.07,1190.58 -613.98,1192.15 -506.61,1192.64 -322.18,1192.64 -420.14,1194.37 -225.62,1194.37 -161.12,1194.37 -95.62,1194.37 -698.07,1220.58 -1215.58,1232.61 -31.58,1232.91 -786.33,1240.42 -698.07,1250.58 -786.33,1270.42 -698.07,1280.58 -786.33,1300 -698.07,1310.58 -1215.58,1330.77 -31.58,1331.07 -698.07,1340.58 -1153.98,1358.07 -1087.98,1358.07 -1024.46,1358.07 -959.46,1358.07 -958.35,1358.07 -892.35,1358.07 -828.83,1358.07 -633.57,1358.07 -570.05,1358.07 -505.05,1358.07 -437.01,1358.07 -373.49,1358.07 -308.49,1358.07 -242.77,1358.07 -179.25,1358.07 -114.25,1358.07 -698.07,1370.58 -1201.39,1417.77 -1171.39,1417.77 -1141.39,1417.77 -1111.39,1417.77 -1081.39,1417.77 -1051.39,1417.77 -1021.39,1417.77 -991.39,1417.77 -961.39,1417.77 -931.39,1417.77 -901.39,1417.77 -223.98,1418.95 -193.98,1418.95 -163.98,1418.95 -133.98,1418.95 -103.98,1418.95 -73.98,1418.95 -43.98,1418.95
GNDD: C2.2 C3.2 C4.2 C5.2 C6.1 C7.2 C8.2 C9.1 C10.2 C11.2 C12.1 C32.1 C33.1 CI1.7 CI2.4 CN3.3 NT1.1 R6.1 R12.1 R19.1 R26.2 T3.2 | length 2847.2
  Top Layer w8: R6.1 -758.35,771.12 -739.05,771.12 -737.98,770.04 -730.28,770.04 -730.28,771.05 -732.39,773.16 v1(-737.98,773.16) ; v1(-756.35,627.85) -754.64,626.13 -728.14,626.13 T3.2 ; -548.39,626.76 -481.98,626.76 -449.03,659.71 -449.03,708.47 -434.53,722.97 -401.22,722.97 -380.08,744.11 C11.2 -359.35,761.08 -347.44,772.99 -305.02,772.99 -293.12,761.08 C32.1 ; C6.1 C9.1 ; C12.1 -293.26,723.34 -293.26,759.9 C32.1 ; R26.2@-254.64,761.03 -292.03,761.03 C32.1 ; -230.05,736.43 -196.42,736.43 -179.03,719.04
  Top Layer w10: v1(-424.08,1046.75) -424.05,1073.65 -418.23,1079.47 CI1.7@-361.35,1079.47 ; CI1.7 -317.11,1079.47 -308.5,1088.09 C5.2@-297.09,1088.09
  Top Layer w12: C5.2@-288.98,1086.62 -255.91,1086.62 C2.2 -249.81,1087.34 -231.47,1069.01 -216.53,1069.01 -198.62,1051.09 -198.62,1008.01 C33.1
  Top Layer w15: CI2.4 v1(-560.08,626.76) ; C8.2 -552.19,837.56 -552.19,799.55 R12.1 -552.19,799.14 -552.19,761.98 C7.2 ; C6.1 -530.9,609.26 -548.39,626.76 v1(-560.08,626.76) ; R19.1@-507.77,801.27 C10.2 -507.83,761.71 -552.34,761.71 C7.2 ; C3.2 C4.2 -223.14,1013.71 -204.33,1013.71 C33.1@-198.62,1008.01 ; v1(-560.08,626.76) -560.08,691.58 -556.32,695.33 -556.32,757.85 C7.2
  Top Layer w20: C33.1 -176.39,1003.5 -192.82,987.08 -192.82,957.67 v1(-161.86,926.71) -149.24,914.09 -149.24,748.83 -179.03,719.04 NT1.1
  Bottom Layer w8: v1(-737.98,773.16) -756.35,754.78 v1(-756.35,627.85) -756.35,624.6 -767.3,613.66 -767.3,393.91 -726.15,352.77 -597.27,352.77 -560.09,389.95 v1(-560.08,626.76)
  Bottom Layer w15: v1(-161.86,926.71) -161.86,974 CN3.3
  other v1: -231.16,900.92 -445.02,929.84 -420.05,934.03 -445.05,974.03 -420.05,974.03 -449.05,1014.03 -420.05,1014.03 -449.05,1054.03 -480.05,1134.03
L15_+5V: C1.1 CN1.6 D1.2 R24.2 | length 377.4
  Top Layer w15: v1(-140.82,537.77) -139.86,538.73 -124.94,538.73 C1.1 ; C1.1@-90.89,572.78 D1.2@-90.89,618.97
  Top Layer w20: R24.2 -130.87,625.61 -95.14,625.61 -90.37,630.38 D1.2
  Bottom Layer w15: CN1.6 -307.22,417.77 -187.22,537.77 v1(-140.82,537.77)
LOCK: CN1.8 D5.2 | length 530.5
  Top Layer w15: D5.2 -187.26,851.6 -176.2,840.54 -176.2,802.23 v1(-175.24,801.27)
  Bottom Layer w15: v1(-175.24,801.27) -96.32,722.35 -96.32,452.92 -109.08,452.92 CN1.8
LOCK_IN: CI1.10 CI4.10 D5.1 R27.2 | length 2180.7
  Top Layer w6: CI4.10 -893.14,987.24 -877.85,987.24 -866.73,976.11 -866.73,846.97 -848.93,829.18 -775.2,829.18 v1(-773.35,831.04) v1(-773.35,894.42) ; R27.2 -775.08,942.9 -742.28,942.9 v1(-737.98,947.19)
  Top Layer w8: v1(-425.35,1151.4) -422.1,1151.4 -417.26,1156.24 CI1.10 ; v1(-344.2,879.16) -343.97,878.93 -343.97,857.16 -338.41,851.6 D5.1
  Bottom Layer w6: v1(-773.35,894.42) -771.54,896.22 -771.54,913.63 v1(-737.98,947.19)
  Bottom Layer w8: v1(-773.35,831.04) -773.35,827.79 -781.3,819.84 -781.3,388.12 -731.95,338.77 -591.47,338.77 -539.94,390.3 -539.94,460.8 -489.03,511.71 -489.03,676.27 -344.2,821.11 v1(-344.2,879.16) -344.2,995.15 -432.57,1083.52 -432.57,1140.94 -425.35,1148.15 v1(-425.35,1151.4)
NetANT1_1: ANT1.1 C31.1 L4.1 | length 106
  Top Layer w20: ANT1.1 -736.31,1386.13 C31.1 -736.31,1282.17 L4.1
NetC6_2: C6.2 CI2.3 R9.2 | length 210.2
  Top Layer w6: CI2.3 -656.51,652.35 -666.44,642.42 -666.44,617.27 -649.17,600 -636.95,600 -613.19,600 -607.9,594.71 R9.2 C6.2
NetC9_2: C9.2 CI2.5 R14.2 | length 145.8
  Top Layer w8: R14.2 -415.52,572.02 -452.65,572.02 C9.2 -452.9,614.66 -442.97,624.58 -394.16,624.58 CI2.5@-392.26,626.48
NetC25_2: C25.2 CI4.26 R7.2 | length 100.1
  Top Layer w5.98: C25.2 R7.2 -1121.77,1094 -1116.15,1088.37 CI4.26 CI4.26@-1090.29,1091.09
NetC28_2: C28.2 C29.2 L3.1 | length 83.9
  Top Layer w20: C28.2 C29.2 -776.28,1105.52 -735.18,1105.52 L3.1
NetC30_2: C30.2 L3.2 L4.2 | length 98.6
  Top Layer w20: L4.2 -735.15,1185.5 C30.2 -735.08,1183.22 L3.2 L3.2@-734.53,1145.34
NetCI2_1: CI2.1 R10.2 R11.1 T3.3 | length 315.4
  Top Layer w8: T3.3@-760.78,721.95 -757.73,718.9 -647.49,718.9 -632.12,703.53 CI2.1
  Top Layer w10: T3.3 -763.16,718.24 -763.16,689.42 -724.91,651.16 -693.4,651.16 R10.2 R11.1
NetCI2_2: CI2.2 R10.1 | length 76.5
  Top Layer w8: R10.1 -684.03,681.16 -616.64,681.16 CI2.2
NetCI2_6: CI2.6 R15.1 | length 72.2
  Top Layer w10: CI2.6@-403.41,652.07 -403.13,652.35 -341.22,652.35 -334.54,645.67 R15.1
NetCI2_7: CI2.7 R23.1 | length 72
  Top Layer w10: CI2.7@-403.41,677.66 -400.36,680.7 -336.54,680.7 R23.1
NetCI4_6: CI4.6 R8.1 | length 219.7
  Top Layer w5.98: R8.1@-1135.01,916.21 R8.1 -969.85,910.23 -962.18,917.9 CI4.6 CI4.6@-964.9,940.58
NetD3_2: D3.2 T1.3 | length 103.4
  Top Layer w8: D3.2 -974.72,711.39 -968.09,718.02 -885.71,718.02 T1.3@-884.72,719.01
NetL1_2: L1.2 L2.1 | length 55
  Top Layer w8: L1.2 -1073.79,1288.77 L2.1
NetR3_1: R3.1 T1.1 | length 366.7
  Top Layer w10: v1(-1160.78,536.37) -1159.47,537.68 -1159.47,573.88 R3.1 ; T1.1 -923.41,626.25 -923.41,662.49 v1(-923.19,662.71)
  Bottom Layer w10: v1(-1160.78,536.37) -1034.44,662.71 v1(-923.19,662.71)
NetR5_2: R5.2 R6.2 T3.1 | length 204.5
  Top Layer w8: R6.2 -800.49,768.34 -800.49,625.15 T3.1 -801.23,606.67 -791.38,596.83 R5.2
NetR15_2: R15.2 R16.1 R23.2 T2.3 | length 207.6
  Top Layer w8: R16.1@-325.75,614.29 R16.1 -304.67,607.65 -294.68,617.64 R15.2 -294.54,645.81 -294.54,681.03 R23.2@-295.18,681.67 ; R23.2 -287.83,690.04 -230.88,690.04 -214.68,706.24 T2.3
NetR17_2: R17.2 R18.2 T2.1 | length 79.5
  Top Layer w8: T2.1@-251.33,613.92 -249.49,612.07 -249.49,574.86 R17.2 ; R17.2@-243.98,570.37 -242.08,572.27 R18.2
NRST: C3.1 CI1.4 CN3.4 | length 426.3
  Top Layer w8: CI1.4@-358.39,1004.55 CI1.4 -315.47,1002.7 -311.77,1006.4 C3.1 -287.73,1006.4 -277.01,995.68 -277.01,967.39 -257.71,948.1 -242.02,948.1 v1(-239.72,945.81)
  Bottom Layer w8: v1(-239.72,945.81) -168.94,1016.59 -168.94,1066.91 CN3.4
OSCIN: CI4.17 XTAL1.1 | length 201.1
  Top Layer w8: XTAL1.1 -962.45,1265.82 -969.4,1265.82 -985.49,1249.73 -985.49,1190.75 -973.22,1178.49 -931.57,1178.49 -922.81,1169.73 CI4.17
OSCOUT: CI4.16 XTAL1.3 | length 106.5
  Top Layer w8: XTAL1.3 -901.37,1196.87 -901.37,1109.77 -899.67,1108.06 CI4.16
PUSH_1: CI4.4
PWM_TPS1_OUT1: CI1.1 R9.1 | length 657.1
  Top Layer w8: R9.1 -647.27,531.32 -625.79,509.84 v1(-535.02,509.84) ; v1(-365.02,904.84) -365.02,923.43 -362.52,925.93 CI1.1
  Bottom Layer w8: v1(-535.02,509.84) -503.03,541.83 -503.03,682.07 -358.74,826.37 -358.74,860.1 -365.02,866.39 v1(-365.02,904.84)
PWM_TPS1_OUT2: CI1.14 R5.1 | length 678.5
  Top Layer w8: R5.1 -749.59,571.69 -749.59,595.28 v1(-747.3,597.57) ; CI1.14 -574.51,1078.78 -508.09,1078.78 v1(-507.4,1078.09)
  Bottom Layer w8: v1(-747.3,597.57) -708.88,635.99 -708.88,847.31 -507.4,1048.79 v1(-507.4,1078.09)
PWM_TPS2_OUT: CI1.13 R14.1 R17.1 | length 1035.4
  Top Layer w8: CI1.13 -517.43,1105.18 -513.67,1108.94 -513.67,1128.48 v1(-511.37,1130.78) ; v1(-540.09,540.34) -539.81,540.07 -376.14,540.07 v1(-375.86,539.79) ; v1@-375.88,539.85 R14.1 ; R17.1@-288.98,570.47 -286.83,568.31 -286.83,542.73 v1(-287.38,542.17)
  Bottom Layer w8: v1(-540.09,540.34) -540.08,867.67 -473.4,934.35 -473.4,1092.8 v1(-511.37,1130.78) ; v1(-375.86,539.79) -374.67,540.98 -288.57,540.98 v1(-287.38,542.17)
RF_1: C28.1 CI4.14 | length 81
  Top Layer w10: C28.1@-818.76,1063.15 -818.76,1064.24 -822.5,1067.98 CI4.14@-895.14,1067.98 ; CI4.14@-895.14,1067.98 CI4.14 CI4.14@-895.14,1067.98
RX: CN2.4 D3.1 R2.1 R4.1 | length 332.8
  Top Layer w8: D3.1 -974.72,606.67 -963.63,595.57 -922.29,595.57 -913.04,586.33 R2.1 ; CN2.4 -881.08,409.85 -913.04,441.81 R2.1 ; R4.1 R2.1
RX_IN: CI1.3 R4.2 | length 1030.2
  Top Layer w8: R4.2@-835.57,560.44 -835.57,539.08 -786.33,489.84 -458.84,489.84 v1(-429.58,519.09) ; CI1.3@-367.22,977.25 -366.45,976.48 -306.2,976.48 v1(-305.57,975.86)
  Bottom Layer w6: v1(-429.58,519.09) -429.58,704.06 -305.57,828.07 v1(-305.57,975.86)
RX_UART: CI4.8 D2.1 | length 292.7
  Top Layer w8: D2.1 -1029.07,701.81 -1029.07,734.75 -1029.32,735 v1@-1029.72,735 ; v1@-922.81,903.73 -923.1,904.02 -923.1,943.01 CI4.8
  Bottom Layer w8: v1(-1028.42,740.29) -1028.42,819.94 -947.26,901.11 v1(-923.38,901.11)
RÉ: CN1.7 R25.2 | length 588.9
  Top Layer w8: R25.2 -212.34,759.18 -185.67,759.18 v1(-183.89,757.39)
  Top Layer w15: v1(-119.82,507.5) -75.73,463.42 -75.73,276.32 -96.38,255.67
  Bottom Layer w15: v1(-183.89,757.39) -117.32,690.82 -117.32,511.36 -119.82,508.86 v1(-119.82,507.5)
RÉ_IN: C32.2 CI1.15 R25.1 R26.1 | length 506.6
  Top Layer w8: CI1.15 -528.29,1053.87 -470.74,996.33 -470.74,927.28 -424.18,880.72 -389.58,880.72 -309.26,800.4 -254.64,800.4 R26.1 R25.1
SWCLK: CI4.12 CN4.2 | length 813.8
  Top Layer w6: CI4.12 -867.14,1029.32 -837.94,1000.12 -837.94,910.33 -808.51,880.91 v1(-808.51,878.42)
  Bottom Layer w6: v1(-808.51,878.42) -785.4,878.42 -782.4,875.42 -765.48,875.42 -679.07,961.82 -679.07,1174.93 -619.31,1234.7 -550.77,1234.7 -499.49,1285.97 CN4.2
SWDIO: CI4.11 CN4.4 | length 1052.4
  Top Layer w6: CI4.11 -867.14,1009.63 -854.73,997.22 -854.73,863.95 -842.34,851.56 v1(-842.34,849.46)
  Bottom Layer w8: v1(-842.34,849.46) -840.77,851.04 -771.48,851.04 -666.07,956.44 -666.07,1169.54 -613.92,1221.7 -364.15,1221.7 -299.88,1285.97 CN4.4
SWIM: CI1.18 CN3.2 | length 916.8
  Top Layer w6: v1@-142.83,1155.97 -141.99,1155.97 -125.48,1139.46 -125.48,992.95 -91.48,958.95 CN3.2
  Top Layer w8: CI1.18 -574.21,978.07 -506.01,978.07 v1(-505.05,979.03) ; v1(-145.05,1159.03) -143.88,1157.86 v1@-143.88,1152.58
  Bottom Layer w8: v1(-505.05,979.03) -487.4,996.69 -487.4,1086.37 -505.46,1104.43 -513.31,1104.43 -531.37,1122.49 -531.37,1157.19 -517.16,1171.4 -160.67,1171.4 -148.3,1159.03 v1(-145.05,1159.03)
TPS1_AD: C8.1 CI1.19 R13.2 | length 261
  Top Layer w8: R13.2 -636.58,816.44 -615.25,837.77 C8.1 -591.39,838.15 -591.39,871.1 v1(-591.01,871.48) ; CI1.19 v1(-525.17,951.52)
  Bottom Layer w8: v1(-591.01,871.48) -527.47,935.02 -527.47,949.22 v1(-525.17,951.52)
TPS1_IN: C7.1 CN1.2 D4.2 R12.2 R13.1 | length 579.7
  Top Layer w6: C7.1@-591.56,761.98 -591.56,799.14 R12.2
  Top Layer w10: D4.2 v1(-688.88,798.33)
  Top Layer w15: D4.2 -686.44,758.64 -639.03,758.64 -636.24,761.43 -592.11,761.43 C7.1
  Bottom Layer w10: v1(-688.88,798.33) -688.88,510.8 -640.3,462.22 CN1.2@-640.3,428.59
  Bottom Layer w15: CN1.2 CN1.2@-640.3,428.59
TPS1_OUT: CN1.1 R11.2 | length 452.8
  Top Layer w15: v1(-741.92,462.62) -741.92,302.87 CN1.1 ; v1(-719.72,570.01) -719.36,569.64 -687.61,569.64 R11.2
  Bottom Layer w15: v1(-741.92,462.62) -741.92,546.46 -719.72,568.65 v1(-719.72,570.01)
TPS1_PWM: CI1.17 D4.1 | length 295.7
  Top Layer w8: D4.1@-687.25,848.27 -682.25,843.27 v1(-658.04,843.27) ; CI1.17 v1(-525.2,1002.7)
  Bottom Layer w8: v1(-658.04,843.27) -658.04,869.86 v1(-525.2,1002.7)
TPS2_AD: C11.1 CI1.20 R20.2 | length 323.9
  Top Layer w8: CI1.20 -522.87,925.94 -496.28,899.35 -496.28,887.78 v1(-493.98,885.48) ; R20.2 C11.1 -379.41,801.13 -379.41,840.91 v1(-378.74,841.59)
  Bottom Layer w8: v1(-493.98,885.48) -422.63,885.48 v1(-378.74,841.59)
TPS2_IN: C10.1 CN1.4 D6.2 R19.2 R20.1 | length 514
  Top Layer w8: v1(-469.03,667.99) -468.72,668.31 -468.72,759.8 -467.57,760.94 R20.1@-424.71,761.71 ; C10.1 -468.5,761.87 -468.5,800.47 R19.2 -468.6,830.78 -447.77,851.6 D6.2
  Bottom Layer w8: CN1.4 -469.03,423.68 v1(-469.03,667.99)
TPS2_OUT: CN1.3 R16.2 | length 426.1
  Top Layer w15: CN1.3 -474.94,204.34 -378.08,301.19 -378.08,462.25 -332.38,507.95 R16.2
TPS2_PWM: CI1.16 D6.1 | length 277.5
  Top Layer w8: CI1.16 -522.5,1028.29 -484.74,990.53 -484.74,921.49 -473.98,910.72 -473.98,858.23 -480.61,851.6 D6.1
TX: CN2.3 D2.2 R1.1 | length 256.3
  Top Layer w10: D2.2@-1029.78,612.78 -1030.75,611.81 -1030.75,570.29 -1025.77,565.31 -1025.77,477.09 -961.08,412.41 CN2.3
TX_OUT: CI1.2 R1.2 | length 1470.2
  Top Layer w6: R1.2@-991.99,569.68 -991.99,540.18 v1(-991.58,539.77)
  Top Layer w8: CI1.2 -307.39,951.52 v1(-275.24,919.37)
  Bottom Layer w8: v1(-991.58,539.77) -902.78,539.77 -795.3,432.29 -795.3,382.32 -737.75,324.77 -424.67,324.77 -395.86,353.58 -395.86,719.39 -275.24,840.02 v1(-275.24,919.37)
TX_UART: CI4.7 T1.2 | length 358.8
  Top Layer w8: v1(-943.38,870) -943.38,942.41 CI4.7
  Top Layer w10: T1.2 -847.63,627.23 -847.63,661.51 v1(-846.43,662.71)
  Bottom Layer w10: v1(-943.38,870) -943.38,759.66 v1(-846.43,662.71)
VCAP: C4.1 CI1.8 | length 285.5
  Top Layer w8: v1(-412.57,1105.62) -412.35,1105.4 -370.46,1105.4 CI1.8@-370.24,1105.19 ; v1(-255.91,974.59) -255.56,974.94 -255.56,1006.04 C4.1
  Bottom Layer w8: v1(-412.57,1105.62) -386.95,1105.62 v1(-255.91,974.59)
VCAP_BLE: C23.2 CI4.27 | length 113.3
  Top Layer w6: C23.2@-1133.97,1020.52 C23.2 -1127.98,1013.5 -1117.47,1024 -1117.47,1063.66 -1112.45,1068.69 CI4.27 CI4.27@-1090.29,1065.98
VFBSD: C26.2 C27.2 CI4.22 L2.2 | length 156.9
  Top Layer w8: CI4.22@-1019.53,1136.74 CI4.22 -1021.24,1166.28 -1013.75,1173.77 -1013.75,1191.87 C27.2 C26.2 -1014.03,1281.92 L2.2
VLXSD: CI4.24 L1.1 | length 235
  Top Layer w8: L1.1 -1156.18,1282.13 -1156.18,1265.16 -1146.72,1255.7 v1(-1108.85,1255.7) ; v1(-1096.82,1180.34) -1096.82,1142.62 -1089.22,1135.03 CI4.24
  Bottom Layer w8: v1(-1108.85,1255.7) -1108.85,1252.45 -1096.82,1240.42 v1(-1096.82,1180.34)
pads on no net: CI1.5 CI1.6 CI1.11 CI1.12 CI3.4 CI4.1 CI4.2 CI4.3 CI4.5 CI4.9 CI4.18 CI4.19 CI4.20 CI4.21 CI4.28 CI4.29 CI4.30 CI4.31 CN4.5 CN4.6

## Polygon pours and split planes (outlines as drawn)
GND on Top Layer "GND_BOT" (solid, remove dead copper, pour order 51): -0.47,1150.27 -625.65,1150.27 -631.04,1144.88 -631.04,531.04 -76,531.04 -53.69,553.35 -53.69,1150.27 -0.47,1150.27 -0.47,3.1 -1244.56,3.1 -1244.56,1443.71 -0.47,1443.71
GNDD on Top Layer "GNDD_TOP" (solid, remove dead copper, pour order 47): -407.48,832.17 -518.2,832.98 -518.17,860.67 -394.37,860.67 -349.73,907.85 -349.73,1132.65 -58.95,1132.65 -58.95,573.31 -116.4,515.86 -300.25,515.86 -405.69,621.29
GNDD on Top Layer "GNDD_TOP_MCU" (solid, pour order 2): -526.33,1162.74 -547.94,1141.13 -547.94,936.85 -515.21,904.12 -429.56,904.12 -402.6,931.08 -402.6,1129.03 -436.31,1162.74
GNDD on Top Layer "GNDD_TOP_AMPOP" (solid, remove dead copper, pour order 37): -564.18,723.29 -584.01,703.45 -584.16,623.35 -562.52,601.7 -470.37,601.7 -429.08,642.98 -429.08,709.27 -443.11,723.29
GNDD on Bottom Layer "GNDD_BOT" (solid, remove dead copper, pour order 49): -616.18,866.92 -616.18,970 -565.85,1020.32 -565.85,900.44 -532.11,866.71 -420.22,866.92 -392.62,894.52 -392.62,1142.22 -64.14,1142.22 -64.14,577.26 -115.97,525.42 -378.74,525.42 -410.59,557.28 -410.59,757.39 -597.13,757.39 -616.18,776.44
GND on Bottom Layer "GND_BOT" (solid, remove dead copper, pour order 44): -0.07,1147.91 -612.42,1147.91 -630.64,1129.7 -630.64,512.01 -106.84,512.01 -53.29,565.56 -53.29,1147.91 -0.07,1147.91 -0.07,0.75 -1244.15,0.75 -1244.15,1443.35 -0.07,1443.35
GNDD on Bottom Layer "GNDD_BOT_MCU" (solid, remove dead copper, pour order 40): -529.94,1158.29 -551.55,1136.68 -551.55,932.4 -525.69,906.54 -426.29,906.54 -406.2,926.63 -406.2,1124.58 -439.91,1158.29
GNDD on Bottom Layer "GNDD_BOT_AMPOP" (solid, remove dead copper, pour order 41): -566.71,722.16 -580.4,708.47 -580.4,551.9 -561.15,532.65 -450.51,532.65 -435.57,547.59 -435.57,705.21 -452.52,722.16

## Keep-outs
Keep-Out Layer, Board:
  the board outline again, w1

## Other copper
Top Layer:
  rectangle net GND: -721.11,1400.06 -236.83,1443.37
  rectangle net GND: -982.14,1400.12 -761.11,1443.42
  region net GND: -822.5,1442.38 -822.5,1374.38 -779.3,1374.38 -779.3,1442.38
  region net +3V: -635.04,1266.31 -635.04,1236.34 -605.5,1236.34 -578.72,1263.12 -608.47,1292.87
  region net +5V: -68.93,868.89 -90.12,890.08 -111,869.2 -111,831.32 -68.93,831.32
  region net GND: -268.21,252.56 -268.21,282.52 -297.74,282.52 -324.52,255.74 -294.77,225.99
  region net +5V: -1040.06,438.81 -1070.02,438.81 -1070.02,409.28 -1043.24,382.49 -1013.49,412.24
  region net TX: -958.86,437.95 -988.83,437.95 -988.83,408.42 -962.04,381.63 -932.29,411.38
  region net RX: -878.22,436.12 -908.19,436.12 -908.19,406.59 -881.41,379.8 -851.66,409.55
  pour cut-out: -761.11,1442.38 -761.11,1072.38 -721.11,1072.38 -721.11,1442.38
  pour cut-out: -232.51,1105.77 -159.07,1105.77 -158.68,1105.38 -158.68,1021.21 -232.51,1021.21
  region net RÉ: -82.18,237.49 -82.18,267.45 -111.72,267.45 -138.5,240.67 -108.75,210.92
  region net GND: -1098.05,433.6 -1119.24,454.79 -1140.12,433.91 -1140.12,396.03 -1098.05,396.03
  region net TPS1_OUT: -683.08,269.31 -713.04,269.31 -713.04,239.78 -686.26,212.99 -656.51,242.74
  region net TPS2_OUT: -400.75,246.7 -400.75,276.67 -430.28,276.67 -457.07,249.89 -427.32,220.14
Bottom Layer:
  region net TPS1_IN: -645.41,496.5 -675.37,496.5 -675.37,466.97 -648.59,440.19 -618.84,469.94
  region net +5V: -1060.76,347.85 -1039.57,326.66 -1018.68,347.54 -1018.68,385.42 -1060.76,385.42
  region net +5V: -1021.41,438.78 -1042.6,459.97 -1063.48,439.09 -1063.48,401.21 -1021.41,401.21
  region net LOCK: -87.1,450.11 -87.1,480.08 -116.63,480.08 -143.42,453.3 -113.67,423.55
  region net GND: -934.37,1443.35 -237.87,1443.35 -237.87,1400 -932.17,1400 -934.17,1402.01 -934.17,1443.35
  pour cut-out: -1148.78,950.87 -1148.78,1262.94 -1138.07,1262.94 -1138.07,950.87
  pour cut-out: -1127.16,967.58 -815.09,967.58 -815.09,956.87 -1127.16,956.87
  region net TPS2_IN: -447.99,476.38 -469.18,497.57 -490.07,476.69 -490.07,438.81 -447.99,438.81
  region net L15_+5V: -237.87,459.44 -237.87,489.41 -267.41,489.41 -294.19,462.62 -264.44,432.87
  region net SWDIO: -326.9,1284.8 -326.9,1254.83 -297.37,1254.83 -270.59,1281.61 -300.34,1311.36
  region net SWCLK: -523.98,1288.06 -523.98,1258.09 -494.45,1258.09 -467.67,1284.88 -497.42,1314.63
  region net NRST: -131.63,1137.25 -131.63,1107.28 -102.1,1107.28 -75.32,1134.07 -105.07,1163.82

## Silkscreen, mask and mechanical layers (free items; w line width, h text height)
Top Overlay:
  drawing of 10 lines, arcs and shapes, not listed
AssyDrw_Mech25:
  lines w2: 1341.28,-92.99 1370.67,-110.78 ; 1341.28,-62.99 1370.67,-45.2 ; 1341.38,-87.15 1410.67,-45.2 ; 1341.38,-68.83 1410.67,-110.78 ; 1342.02,-110.99 1451.02,-44.99 ; 1342.02,-44.99 1451.02,-110.99 ; 1382.36,-110.78 1451.65,-68.83 ; 1382.36,-45.2 1451.65,-87.15 ; 1422.36,-110.78 1451.75,-92.99 ; 1422.36,-45.2 1451.75,-62.99